# Altium PCB Cubit3_solar_panel.PcbDoc
Units mm, origin at the board's own origin, x right, y up, seen from the top; angles counter-clockwise.
Board outline 57.66 x 70 mm, 2 copper layers (Top Layer, Bottom Layer), stack 1.569 mm thick; 15 components, 99 nets, 26 pads, 2 vias.
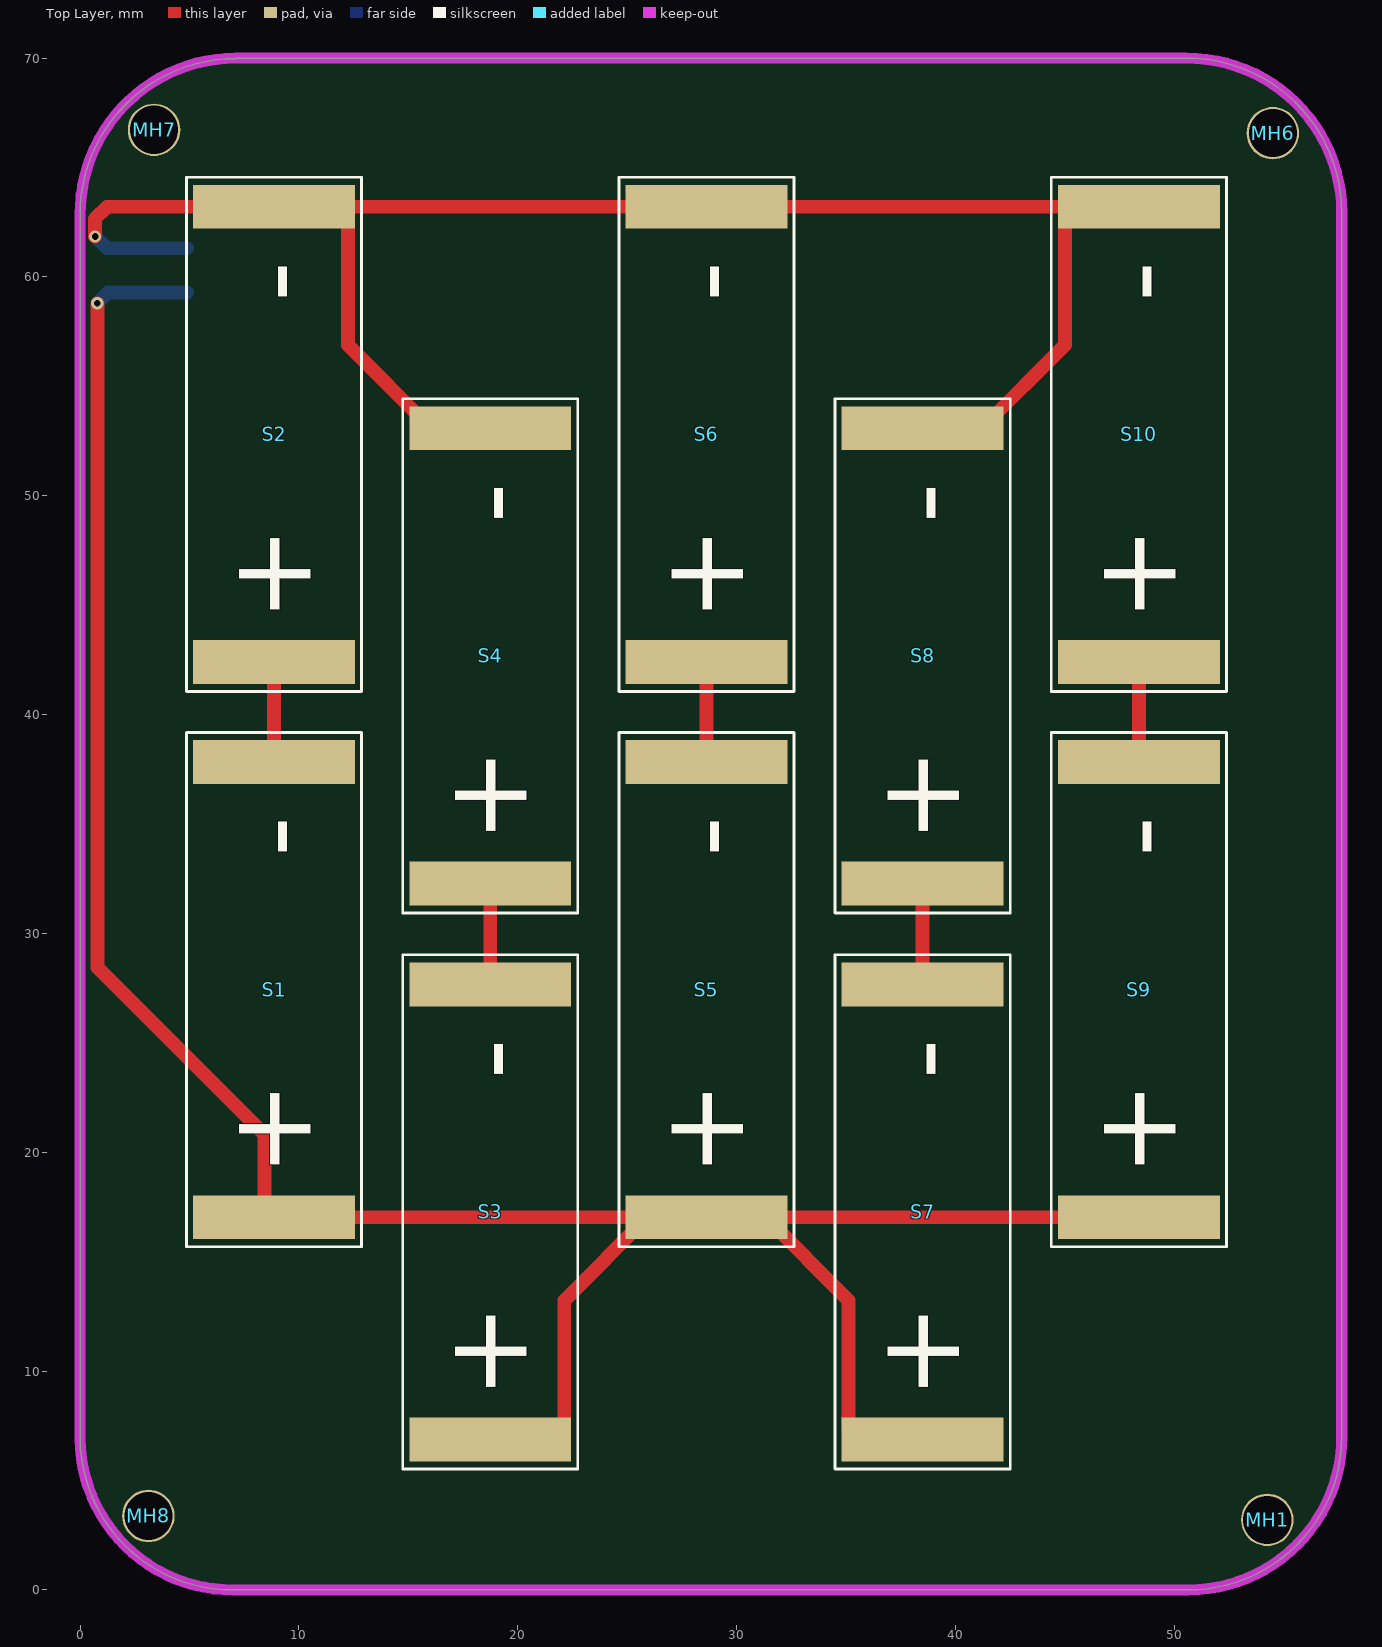
[diagram p0: Top Layer view]
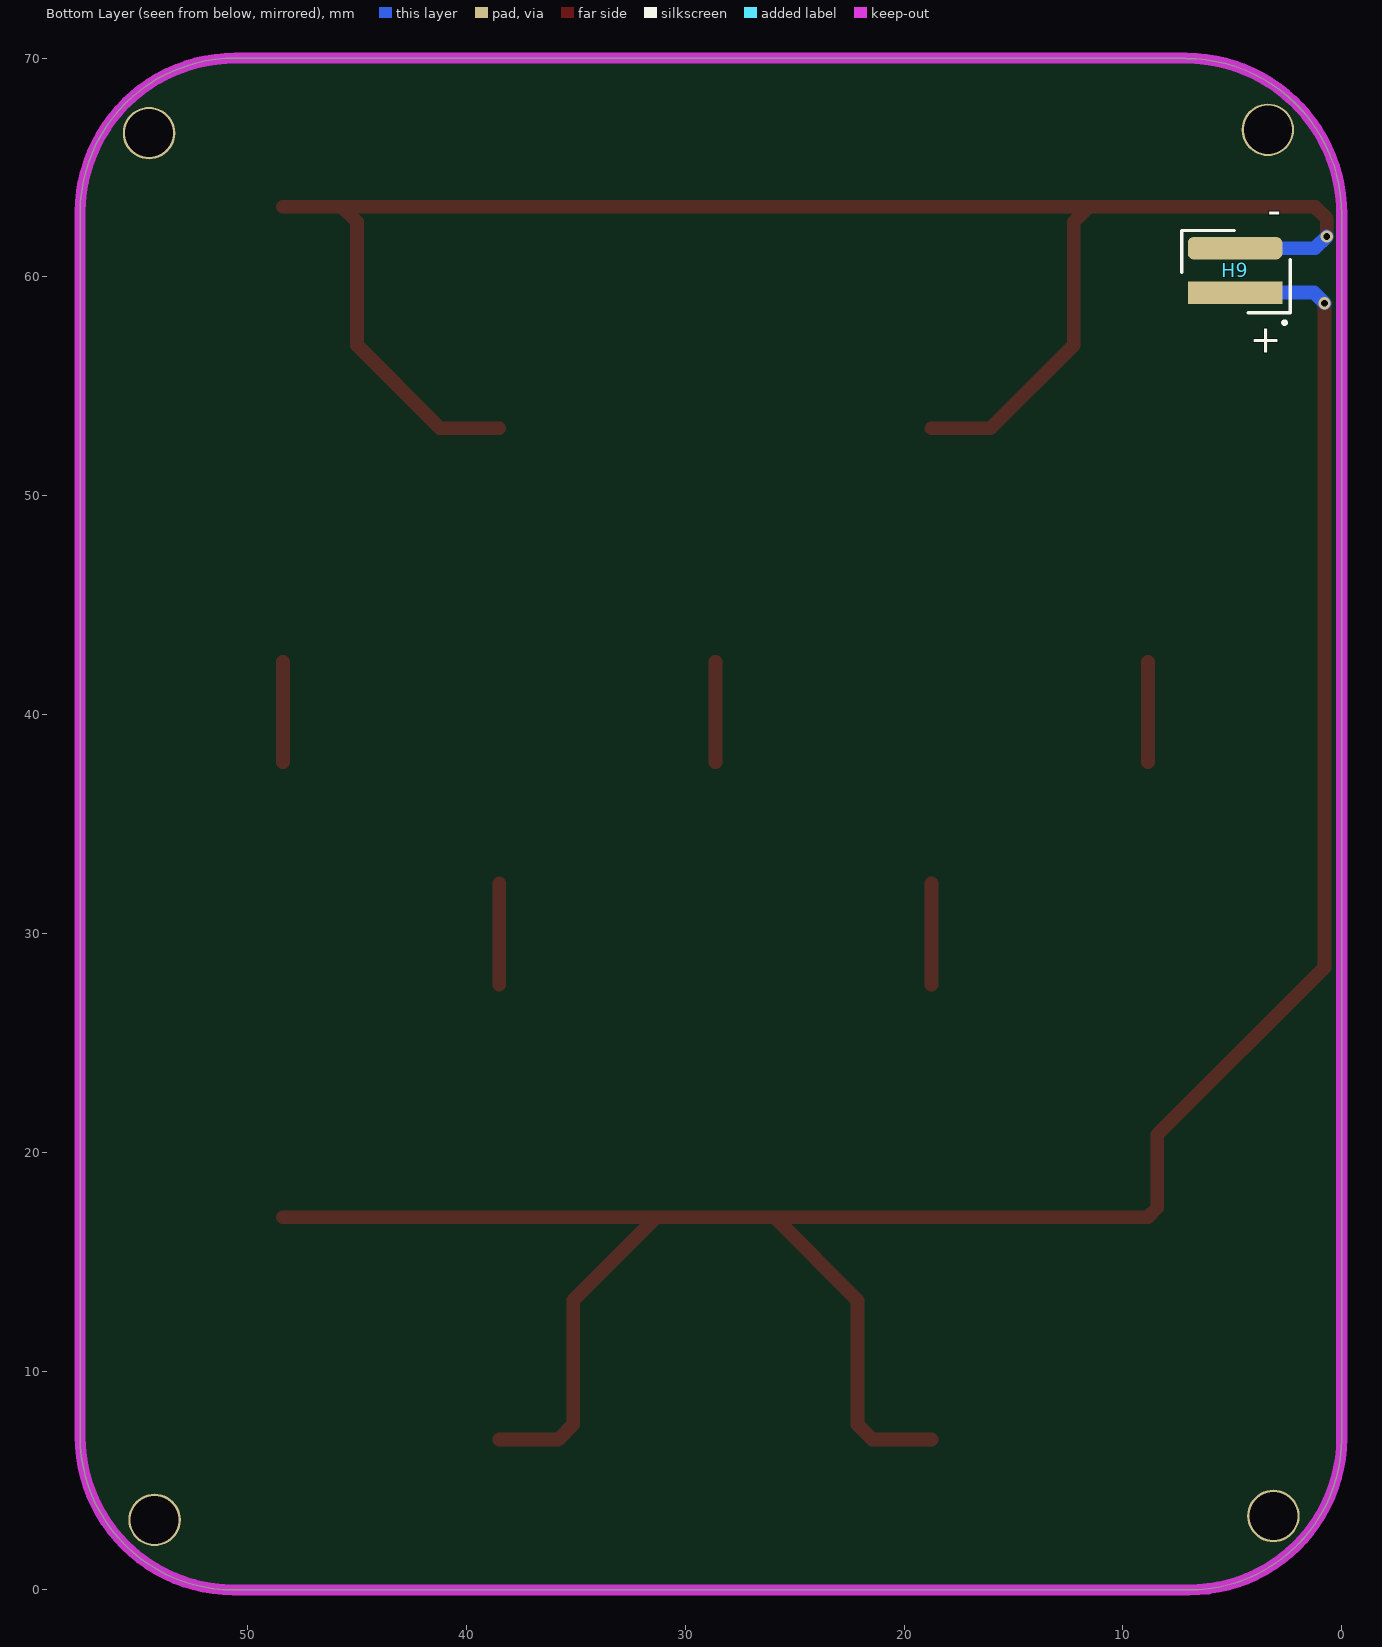
[diagram p1: Bottom Layer view, seen from below]
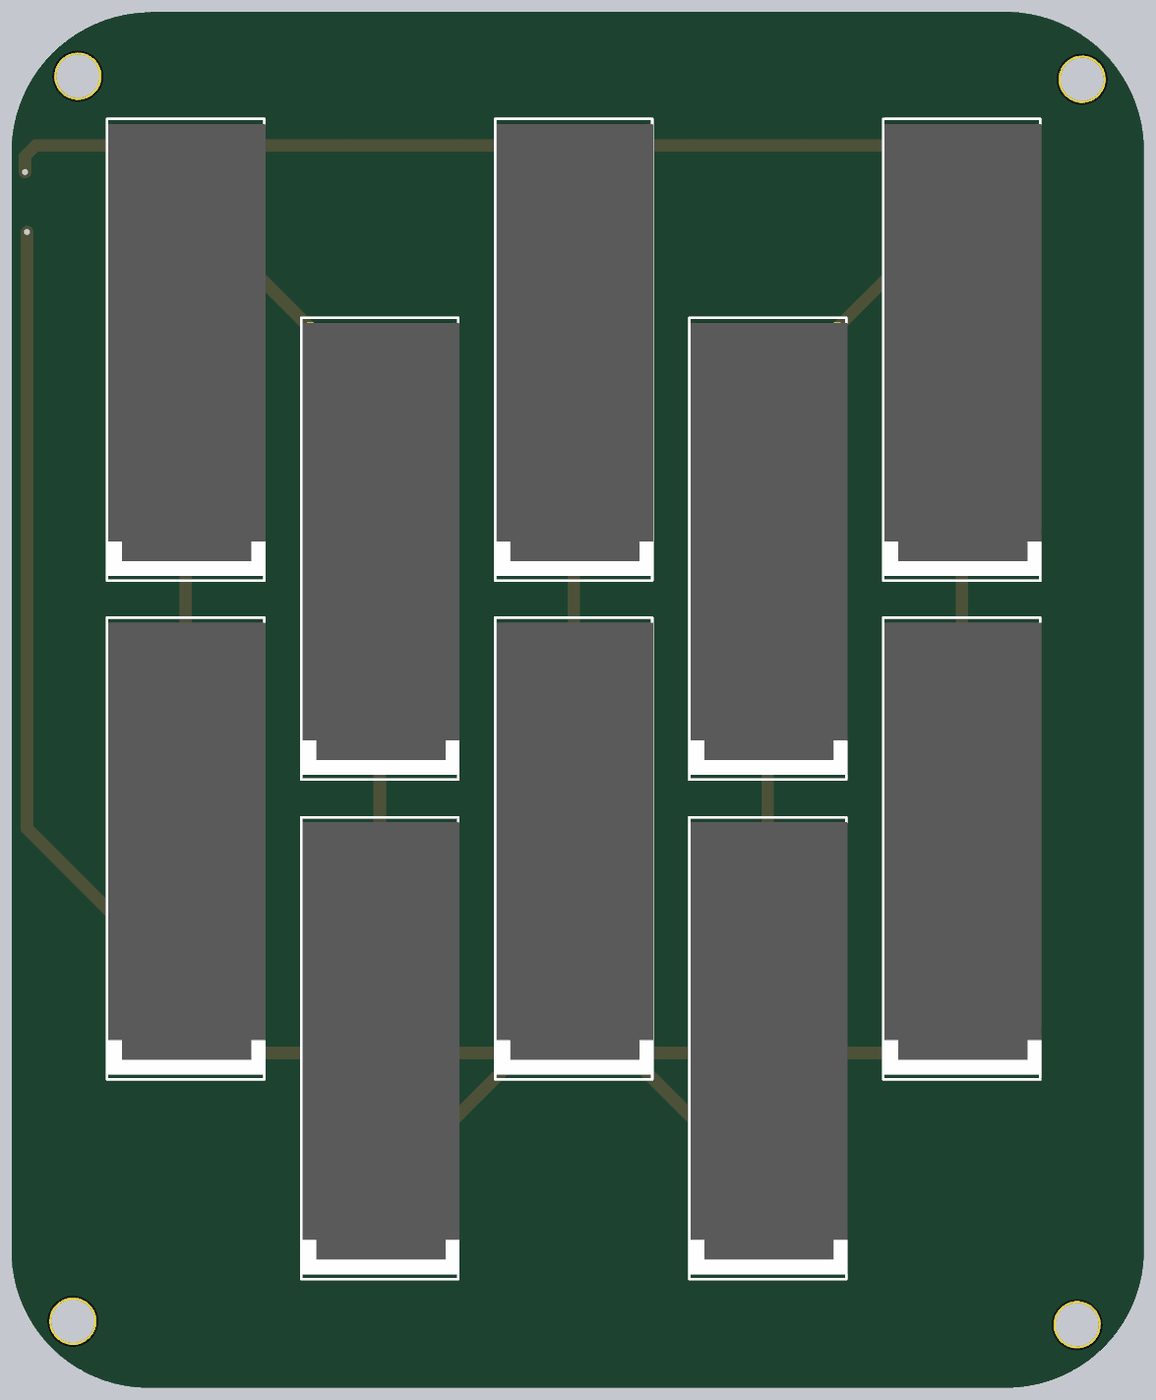
[diagram p2: 3D render of the assembled board from above, using the file's embedded part models]

## Layer stack, top to bottom
Top Solder: solder mask 0.0254, SM-001, Dk 4
Top Layer: signal copper 0.035
Dielectric 1: core 1.4986, Core-043, Dk 4.3
Bottom Layer: signal copper 0.035
Bottom Solder: solder mask 0.0254, SM-001, Dk 4

## Board outline
0,6.912 ccw(c6.961,6.961) 7.01,0 50.648,0 ccw(c50.648,7.01) 57.658,7.01 57.658,62.967 ccw(c50.584,62.929) 50.546,70.002 7.112,70.002 7.112,69.977 ccw(c7.112,62.865) 0,62.865

## Design rules (kind name [scope] priority, off if disabled: settings)
Clearance [All] p1: gap=0.254 ignorepadtopadclearanceinfootprint=FALSE except(0: Arc-Hole Track-Hole SMDPad-Hole THPad-Hole Via-Hole Fill-Hole Poly-Hole Region-Hole Text-Hole)
PolygonConnect [All vs IsNamedPolygon('FEED_L01_P019')] p1: thpad.connectstyle=Direct thpad.reliefconductorwidth=0.254 thpad.reliefentries=4 thpad.polygonreliefangle="90 Angle" thpad.airgapwidth=0.254 smdpad.connectstyle=Direct smdpad.reliefconductorwidth=0.254 smdpad.reliefentries=4 smdpad.polygonreliefangle="90 Angle" smdpad.airgapwidth=0.254 via.connectstyle=Relief via.reliefconductorwidth=0.254 via.reliefentries=4 via.polygonreliefangle="90 Angle" via.airgapwidth=0.254
PolygonConnect polygon_F_Ant_GND [HasFootprint('F_ANTENNA_FOOTPRINT')] p2: connectstyle=Direct reliefconductorwidth=0.254 reliefentries=4 polygonreliefangle="90 Angle" airgapwidth=0.254
PolygonConnect power_traces [InNetClass('power_class')] p3: thpad.connectstyle=Relief thpad.reliefconductorwidth=0.254 thpad.reliefentries=4 thpad.polygonreliefangle="90 Angle" thpad.airgapwidth=0.254 smdpad.connectstyle=Direct smdpad.reliefconductorwidth=0.254 smdpad.reliefentries=4 smdpad.polygonreliefangle="90 Angle" smdpad.airgapwidth=0.254 via.connectstyle=Relief via.reliefconductorwidth=0.254 via.reliefentries=4 via.polygonreliefangle="90 Angle" via.airgapwidth=0.254
PolygonConnect F_Antenna_plane [IsNamedPolygon('GND_L01_P007')] p4: thpad.connectstyle=Relief thpad.reliefconductorwidth=0.254 thpad.reliefentries=4 thpad.polygonreliefangle="90 Angle" thpad.airgapwidth=0.254 smdpad.connectstyle=Relief smdpad.reliefconductorwidth=0.254 smdpad.reliefentries=4 smdpad.polygonreliefangle="90 Angle" smdpad.airgapwidth=0.254 via.connectstyle=Direct via.reliefconductorwidth=0.254 via.reliefentries=4 via.polygonreliefangle="90 Angle" via.airgapwidth=0.254
RoutingVias [All] p1: holewidth=0.305 width=0.559 viastyle="Through Hole" minholewidth=0.305 minwidth=0.559 maxholewidth=0.305 maxwidth=0.559
SolderMaskExpansion [All] p1: expansion=0.102 istentingtop=FALSE
Width "Schematic Width Constraint_9" [InNet('NetH6_1')] p1: maxlimit=2.54 minlimit=0.508 preferedwidth=0.508 minimp=50.000000 maximp=50.000000 favimp=50.000000
Width "Schematic Width Constraint_8" [InNet('NetH6_2')] p2: maxlimit=2.54 minlimit=0.508 preferedwidth=0.508 minimp=50.000000 maximp=50.000000 favimp=50.000000
Width "Schematic Width Constraint_7" [InNet('NetD1_A')] p3: maxlimit=2.54 minlimit=0.152 preferedwidth=0.508 minimp=50.000000 maximp=50.000000 favimp=50.000000
Width "Schematic Width Constraint_6" [InNet('+3V2_VMCU')] p4: maxlimit=2.54 minlimit=0.152 preferedwidth=0.508 minimp=50.000000 maximp=50.000000 favimp=50.000000
Width "Schematic Width Constraint_5" [InNet('+3V7_VBAT')] p5: maxlimit=2.54 minlimit=0.152 preferedwidth=0.508 minimp=50.000000 maximp=50.000000 favimp=50.000000
Width "Schematic Width Constraint_4" [InNet('VOUT')] p6: maxlimit=2.54 minlimit=0.152 preferedwidth=0.508 minimp=50.000000 maximp=50.000000 favimp=50.000000
Width "Schematic Width Constraint_3" [InNet('VIN_DC')] p7: maxlimit=2.54 minlimit=0.152 preferedwidth=0.508 minimp=50.000000 maximp=50.000000 favimp=50.000000
Width "Schematic Width Constraint_2" [InNet('LBUCK')] p8: maxlimit=2.54 minlimit=0.152 preferedwidth=0.508 minimp=50.000000 maximp=50.000000 favimp=50.000000
Width "Schematic Width Constraint_1" [InNet('+5V_VBUS')] p9: maxlimit=2.54 minlimit=0.152 preferedwidth=0.508 minimp=50.000000 maximp=50.000000 favimp=50.000000
Width "Schematic Width Constraint" [InNet('LBOOST')] p10: maxlimit=2.54 minlimit=0.152 preferedwidth=0.508 minimp=50.000000 maximp=50.000000 favimp=50.000000
Width [All] p11: maxlimit=2.54 minlimit=0.152 preferedwidth=0.203 minimp=50.000000 maximp=50.000000 favimp=50.000000
30 further rules are at their usual default settings.

## Classes and differential pairs
component class solar_cell: S1 S2 S3 S4 S5 S6 S7 S8 S9 S10

## Components (designator, comment, footprint, x,y, rotation, side; value= is the part's Value field where it differs from the comment)
H9 "SMT connector" BAT_CONN 4.801,60.324 r0 bottom
MH1 "#4_Hole" HOLE_#4 54.254,3.2 r0 top
MH6 "#4_Hole" HOLE_#4 54.508,66.573 r0 top
MH7 "#4_Hole" HOLE_#4 3.378,66.726 r0 top
MH8 "#4_Hole" HOLE_#4 3.124,3.378 r0 top
S1 "Solar Cell" KXOB25-14X1F 8.865,27.432 r90 top
S2 "Solar Cell" KXOB25-14X1F 8.865,52.807 r90 top
S3 "Solar Cell" KXOB25-14X1F 18.745,17.272 r90 top
S4 "Solar Cell" KXOB25-14X1F 18.745,42.686 r90 top
S5 "Solar Cell" KXOB25-14X1F 28.625,27.432 r90 top
S6 "Solar Cell" KXOB25-14X1F 28.625,52.807 r90 top
S7 "Solar Cell" KXOB25-14X1F 38.505,17.272 r90 top
S8 "Solar Cell" KXOB25-14X1F 38.505,42.686 r90 top
S9 "Solar Cell" KXOB25-14X1F 48.384,27.432 r90 top
S10 "Solar Cell" KXOB25-14X1F 48.384,52.807 r90 top

## Footprints (in the part's own frame and the unit in brackets; to place one, negate y for a bottom-side part, rotate by r counter-clockwise, add the part's x,y. Pads: shape width x height; smd on the part's side, far side on the other; paste and mask are expansions set on the pad)
BAT_CONN [mil] "2.00MM_PITCH"
  rect 170x40 smd paste+0 mask+2: V+(3,41)
  rrect50% 170x40 smd paste+0 mask+2: V-(3,-39)
  silkscreen extent -96,-71 99,98
HOLE_#4 [mm]
  round 2.4 hole 2.2: 1(0,0)
KXOB25-14X1F [mm]
  rect 2x7.4 smd: V+(-10.4,0) V-(10.4,0)
  silkscreen extent -11.75,-4 11.75,4, body extent -11.5,-4.06 11.5,3.94, height 1.8

## Part data
H9: library part batt_conn_pad, "2.00mm Pitch"
MH1 MH6 MH7 MH8: library part Mechanical_Hole
S1 S2 S3 S4 S5 S6 S7 S8 S9 S10: library part KXOB25-14X1F, "Monocrystalline SOLAR CELL 30.7MW 690MV", Package=None, Availability=Bad, Check_prices=https://www.snapeda.com/parts/KXOB25-14X1F/Sola/view-part/5163586/?ref=eda, MF="ANYSOLAR Ltd", MP=KXOB25-14X1F, Price=None, SnapEDA_Link=https://www.snapeda.com/parts/KXOB25-14X1F/Sola/view-part/5163586/?ref=snap

## Via types
v1: diameter 0.559, hole 0.305, Top Layer to Bottom Layer, tented both sides, 2 vias

## Nets (pads, with @x,y where several pads share a name; then routed paths per layer and width w, separated by ;. In a path a pad name is that pad's centre, name@x,y a point inside that pad or via, vN(x,y) a via of type N, cw(c..) or ccw(c..) an arc to the next point about the centre after c; other vN are vias at no path point)
2G4RF_IOP: 
+1V8_DCDC: 
+3V2_VMCU: 
+3V2_VMCU_S: 
+3V7_VBAT: 
+5V_VBUS: 
AVDD: 
BATT_MON_ALRT: 
BRD_Reset: 
DECOUPLE: 
FEED: 
GND: 
HFXTAL_N: 
HFXTAL_P: 
I2C0_SCL: 
I2C0_SDA: 
IMU_CAP: 
LASER_PWR: 
LASER_SW: 
LBOOST: 
LBUCK: 
LCD_CS: 
LCD_EXTCOM: 
LFXTAL_N: 
LFXTAL_P: 
MAG_ENC_A: 
MAG_ENC_B: 
MAG_ENC_DATA_SW: 
MAG_ENC_P_A: 
MAG_ENC_P_B: 
MAG_ENC_P_CS: 
MAG_ENC_P_PW: 
MAG_ENC_P_SW: 
MAG_ENC_W_A: 
MAG_ENC_W_B: 
MAG_ENC_W_CS: 
MAG_ENC_W_PW: 
MAG_ENC_W_SW: 
NetC2_1: 
NetC7_1: 
NetD1_A: 
NetH1_1: 
NetH1_3: 
NetH4_3: 
NetH9_V+: H9.V+ S1.V+ S3.V+ S5.V+ S7.V+ S9.V+ | length 118.4
  Top Layer w0.635: v1(0.787,58.801) 0.787,28.448 8.433,20.803 8.433,17.464 S1.V+ S5.V+@25.925,17.032 ; S3.V+ 21.445,6.872 22.127,7.555 22.127,13.235 S5.V+@25.925,17.032 ; S7.V+ 35.805,6.872 35.122,7.555 35.122,13.235 S5.V+@31.325,17.032 ; S9.V+ S5.V+@31.325,17.032 ; S5.V+@25.925,17.032 S5.V+ S5.V+@31.325,17.032
  Bottom Layer w0.635: v1(0.787,58.801) 1.269,59.282 H9.V+
NetH9_V-: H9.V- S2.V- S4.V- S6.V- S8.V- S10.V- | length 82.5
  Top Layer w0.635: v1(0.686,61.849) 0.686,62.662 1.231,63.207 S2.V-@11.565,63.207 ; S4.V- 16.045,53.086 12.247,56.883 12.247,62.524 S2.V-@11.565,63.207 ; S8.V- 41.205,53.086 45.002,56.883 45.002,62.524 S10.V-@45.684,63.207 ; S10.V- S10.V-@45.684,63.207 ; S2.V-@11.565,63.207 S6.V- S10.V-@45.684,63.207
  Bottom Layer w0.635: v1(0.686,61.849) 1.221,61.314 H9.V-
NetL6_2: 
NetLCD1_8: 
NetLED4_C: 
NetLED5_C: 
NetLED6_C: 
NetLED7_C: 
NetLED8_C: 
NetLED10_C: 
NetLED11_C: 
NetLED12_C: 
NetR4_1: 
NetR18_2: 
NetR19_2: 
NetS1_V-: S1.V- S2.V+ | length 4.6
  Top Layer w0.635: S1.V- S2.V+
NetS3_V-: S3.V- S4.V+ | length 4.6
  Top Layer w0.635: S3.V- S4.V+
NetS5_V-: S5.V- S6.V+ | length 4.6
  Top Layer w0.635: S5.V- S6.V+
NetS7_V-: S7.V- S8.V+ | length 4.6
  Top Layer w0.635: S7.V- S8.V+
NetS9_V-: S9.V- S10.V+ | length 4.6
  Top Layer w0.635: S9.V- S10.V+
OK_HYST: 
OK_PROG: 
PAVDD: 
PTI_DATA: 
PTI_FRAME: 
RFVDD: 
SOLAR_IN: 
SPI_CLK: 
SPI_CLK_MAG: 
SPI_MISO_MAG: 
SPI_MOSI: 
SPI_MOSI_MAG: 
SW_DOWN: 
SW_GO: 
SW_UP: 
SWCLK: 
SWDIO: 
SWO: 
Test_Pin: 
ULTSEN_PWR: 
ULTSEN_SW: 
US0_RX: 
US0_TX: 
US2_RX: 
US2_TX: 
VBAT_OK: 
VBAT_OV: 
VIN_DC: 
VOC_SAMP: 
VOUT: 
VOUT_SET: 
VRDIV: 
VREF_SAMP: 
VREGSW: 
VSTOR: 
pads on no net: MH1.1 MH6.1 MH7.1 MH8.1

## Keep-outs
Keep-Out Layer:
  lines w0.508: 0,6.909 0,62.865 cw(c7.125,62.878) 7.112,70.002 50.546,70.002 cw(c50.584,62.929) 57.658,62.967 57.658,7.01 cw(c50.648,7.01) 50.648,0 7.01,0 cw(c6.961,6.961) 0,6.912

## Silkscreen, mask and mechanical layers (free items; w line width, h text height)
Bottom Overlay:
  text "-" at 2.769,62.433 h1.27
  text "+" at 2.743,56.532 h1.27

## Text inside footprints (layer, text, board x,y; h text height)
S1: Top Overlay "+" at 10.541,18.872 h3.81 r90; Top Overlay "-" at 10.668,33.477 h3.81 r90
S2: Top Overlay "-" at 10.668,58.852 h3.81 r90; Top Overlay "+" at 10.541,44.247 h3.81 r90
S3: Top Overlay "+" at 20.421,8.712 h3.81 r90; Top Overlay "-" at 20.548,23.317 h3.81 r90
S4: Top Overlay "-" at 20.548,48.731 h3.81 r90; Top Overlay "+" at 20.421,34.126 h3.81 r90
S5: Top Overlay "+" at 30.301,18.872 h3.81 r90; Top Overlay "-" at 30.428,33.477 h3.81 r90
S6: Top Overlay "-" at 30.428,58.852 h3.81 r90; Top Overlay "+" at 30.301,44.247 h3.81 r90
S7: Top Overlay "+" at 40.181,8.712 h3.81 r90; Top Overlay "-" at 40.308,23.317 h3.81 r90
S8: Top Overlay "-" at 40.308,48.731 h3.81 r90; Top Overlay "+" at 40.181,34.126 h3.81 r90
S9: Top Overlay "+" at 50.061,18.872 h3.81 r90; Top Overlay "-" at 50.188,33.477 h3.81 r90
S10: Top Overlay "-" at 50.188,58.852 h3.81 r90; Top Overlay "+" at 50.061,44.247 h3.81 r90